# Altium PCB SolderingStation-CS.PcbDoc (part 2 of 2)
Units mm, origin at the board's own origin, x right, y up, seen from the top; angles counter-clockwise.
Board outline 138.15 x 60.81 mm, 2 copper layers (Top Layer, Bottom Layer), stack 1.671 mm thick; 179 components, 102 nets, 520 pads, 415 vias.
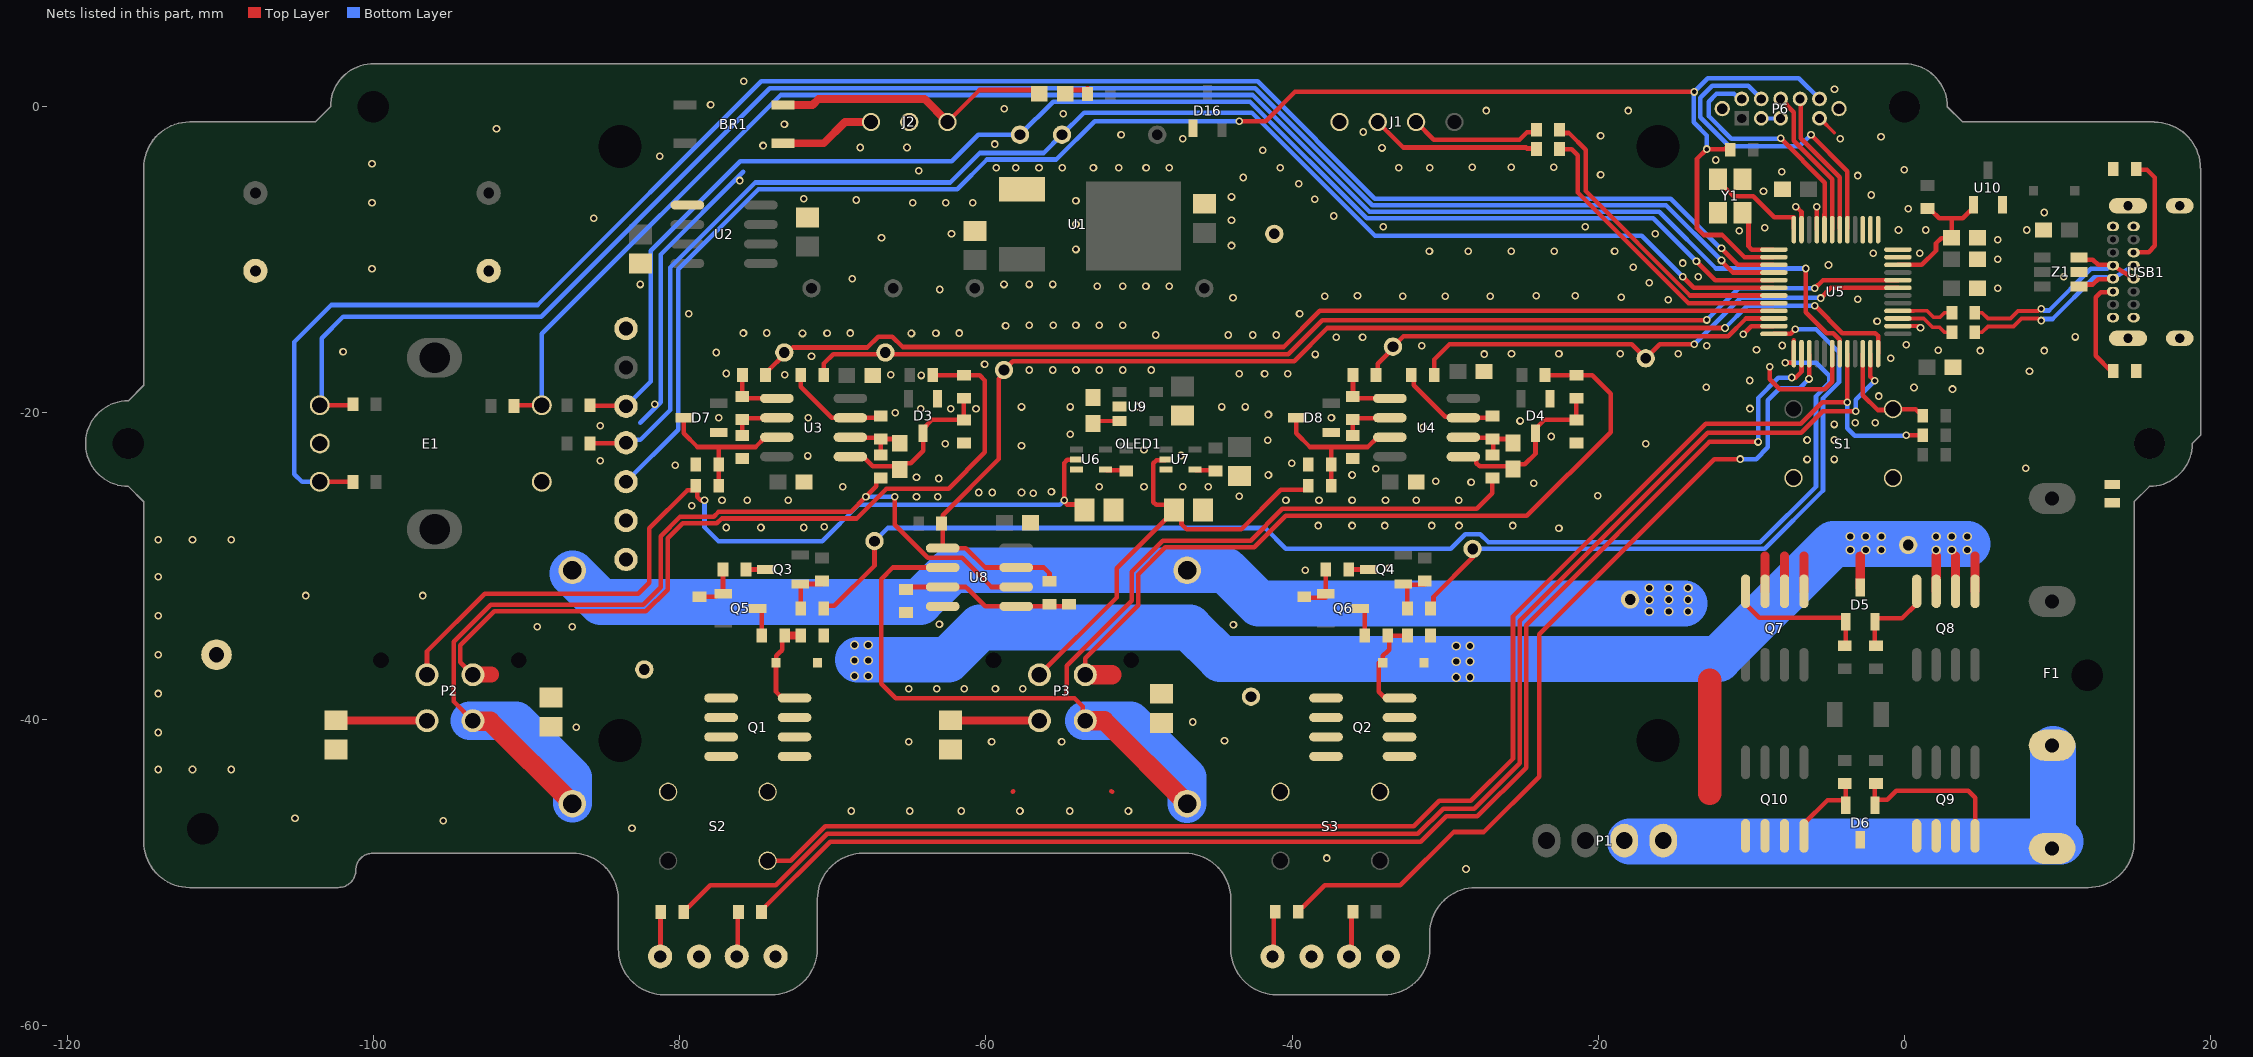
[diagram p2: the nets of this part, all layers, seen from the top]

## Via types
v1: diameter 0.5, hole 0.3, Top Layer to Bottom Layer, tented both sides, 350 vias
v2: diameter 0.6, hole 0.4, Top Layer to Bottom Layer, tented both sides, 51 vias
v3: diameter 0.5, hole 0.3, Top Layer to Bottom Layer, 14 vias

## Nets (pads, with @x,y where several pads share a name; then routed paths per layer and width w, separated by ;. In a path a pad name is that pad's centre, name@x,y a point inside that pad or via, vN(x,y) a via of type N, cw(c..) or ccw(c..) an arc to the next point about the centre after c; other vN are vias at no path point) (continued)
CH1_DRV: R8.2 TP_D1.1 U5.36 | length 43.7
  Top Layer w0.3: R8.2@-30.962,-32.766 R8.2@-30.802,-32.606 ; R8.2@-30.802,-32.86 R8.2@-30.802,-32.606 ; TP_D1.1@-28.155,-29.39 -30.762,-31.997 -30.762,-32.566 R8.2@-30.802,-32.606 ; U5.36@-8.526,-14.832 -7.433,-14.832 v1(-7.13,-14.529)
  Bottom Layer w0.3: TP_D1.1@-28.206,-28.882 -9.134,-28.882 -5.321,-25.069 -5.321,-19.052 -4.274,-18.005 -4.274,-16.035 -5.779,-14.529 v1(-7.13,-14.529)
CH1_Htr: C25.1 P3.4 Q2.5 Q2.6 Q2.7 Q2.8 R14.1 R16.2 TP_H1.1 | length 51.2
  Top Layer w0.3: P3.4@-53.5,-37.103 -53.5,-36.012 -50.05,-32.562 -50.05,-30.553 -48.273,-28.776 -42.476,-28.776 -40.423,-26.723 -24.658,-26.723 -19.189,-21.254 -19.189,-18.751 -20.402,-17.538 R16.2@-21.43,-17.538 ; R14.1@-23.474,-17.526 -23.468,-17.532 -21.944,-17.532 -21.938,-17.538
  Top Layer w1.27: P3.4@-53.5,-37.103 -51.778,-37.103
CH1_NTC: C23.1 P3.3 R30.1 U7.2 | length 30
  Top Layer w0.3: P3.3@-56.5,-37.103 -51.454,-32.057 -51.454,-30.159 -48.237,-26.942 -48.221,-26.942 C23.1@-47.764,-26.485 ; U7.2@-48.229,-23.04 -48.279,-23.09 -48.853,-23.09 -49.057,-23.294 -49.057,-25.834 -48.881,-26.01 -48.053,-26.01 C23.1@-47.721,-26.342 ; C23.1@-47.721,-26.442 C23.1@-47.721,-26.342 ; R30.1@-38.944,-25.019 -40.729,-25.019 -43.322,-27.612 -46.875,-27.612 -47.221,-27.266 -47.221,-26.842 C23.1@-47.721,-26.342
CH1_NTC_B: R63.1 TP_NTC1.1 U5.34 | length 28
  Top Layer w0.3: R63.1@-34.518,-17.526 -34.414,-17.422 -34.414,-16.802 -33.413,-15.801 TP_NTC1.1@-33.413,-15.674 -32.721,-14.982 -11.503,-14.982 -10.353,-13.832 U5.34@-8.526,-13.832
CH1_Ret: P3.1 R23.1 R26.2 U8.2 | length 81.6
  Top Layer w0.3: U8.2@-62.814,-30.099 -66.079,-30.099 -66.839,-30.859 -66.839,-37.696 -65.89,-38.645 -54.724,-38.645 -54.206,-38.645 -53.673,-39.179 -53.673,-39.993 P3.1@-53.562,-40.103 ; -54.724,-38.636 -54.724,-36.502 -50.482,-32.26 -50.482,-30.381 -48.45,-28.349 -42.709,-28.349 -40.627,-26.266 -27.924,-26.266 -26.911,-25.253 R23.1@-26.911,-24.245
  Top Layer w1.27: P3.1@-53.562,-40.103 P3.1@-53.5,-40.103 -52.266,-40.103 R26.2@-46.85,-45.519
  Bottom Layer w2.54: P3.1@-53.562,-40.103 P3.1@-53.5,-40.103 -50.545,-40.103 -46.85,-43.797 R26.2@-46.85,-45.519
CH1_SB: R65.1 U5.31 | length 20
  Top Layer w0.3: R65.1@-22.531,-1.502 -22.531,-1.522 -22.331,-1.722 -21.914,-1.722 -20.828,-2.808 -20.828,-5.509 -14.005,-12.332 U5.31@-8.576,-12.332
CH1_SEL: R47.1 U5.39 | length 56.7
  Top Layer w0.3: R47.1@-39.598,-52.578 -39.598,-52.478 -39.398,-52.278 -39.298,-52.278 -37.873,-50.853 -32.93,-50.853 -29.448,-47.371 -27.477,-47.371 -23.859,-43.752 -23.859,-34.455 -12.419,-23.015 v1(-10.731,-23.015) ; v1@-6.226,-17.782 U5.39@-6.226,-16.182
  Bottom Layer w0.3: v1(-10.731,-23.015) -9.689,-23.015 -8.927,-22.253 -8.927,-19.179 -8.14,-18.392 -6.845,-18.392 v1(-6.235,-17.782)
CH1_TC: R61.1 TP_TC1.1 U5.7 | length 34
  Top Layer w0.3: R61.1@-30.708,-17.526 -30.708,-16.514 -29.716,-15.522 -17.817,-15.522 TP_TC1.1@-16.903,-16.436 -15.989,-15.522 v1(-13.728,-15.522) ; v1(-5.473,-12.499) -4.806,-11.832 U5.7@-0.426,-11.832
  Bottom Layer w0.3: v1(-13.728,-15.522) -10.686,-12.48 -5.492,-12.48 v1(-5.473,-12.499)
CH2_ACT: R52.2 U5.38 | length 90.9
  Top Layer w0.3: R52.2@-74.65,-52.594 -74.65,-52.494 -70.162,-48.006 -31.582,-48.006 -29.931,-46.355 -27.898,-46.355 -24.713,-43.169 -24.713,-33.872 -12.738,-21.897 v1(-9.562,-21.897) ; v1(-7.353,-17.687) -7.107,-17.687 -6.726,-17.306 U5.38@-6.726,-16.182
  Bottom Layer w0.3: v1(-9.562,-21.897) -9.562,-19.027 -8.242,-17.706 -7.372,-17.706 v1(-7.353,-17.687)
CH2_BTN: R38.1 S2.2 U5.44 | length 98.4
  Top Layer w0.3: S2.2@-74.25,-49.25 -72.745,-49.25 -70.485,-46.99 -32.039,-46.99 -30.388,-45.339 -28.319,-45.339 -25.567,-42.587 -25.567,-33.289 -12.979,-20.701 -6.766,-20.701 -5.371,-19.306 v1(-3.746,-19.306) -3.726,-19.286 U5.44@-3.726,-16.132 ; v1(0.114,-21.463) R38.1@1.193,-21.463
  Bottom Layer w0.3: v1(-3.746,-19.306) -3.746,-20.991 -3.236,-21.501 0.102,-21.501 v1@0.114,-21.514
CH2_DRV: R7.2 TP_D2.1 U5.37 | length 83
  Top Layer w0.3: R7.2@-70.586,-32.766 -70.586,-32.762 -70.426,-32.603 -69.903,-32.603 -67.272,-29.972 TP_D2.1@-67.272,-28.804 ; v1(-7.784,-16.715) -7.226,-16.715 U5.37@-7.226,-16.132 U5.37@-7.226,-15.243
  Bottom Layer w0.3: TP_D2.1@-67.271,-28.374 -66.414,-27.517 -41.755,-27.517 -40.408,-28.863 -29.635,-28.863 -28.689,-27.917 -27.698,-27.917 -27.167,-28.448 -9.411,-28.448 -5.778,-24.815 -5.778,-18.9 -4.921,-18.043 -4.921,-17.564 -5.769,-16.715 v1(-7.784,-16.715)
CH2_Htr: C24.1 P2.4 Q1.5 Q1.6 Q1.7 Q1.8 R13.1 R15.2 TP_H2.1 | length 52.7
  Top Layer w0.3: P2.4@-93.5,-37.103 -94.323,-36.28 -94.323,-35.179 -92.111,-32.967 -82.205,-32.967 -80.784,-31.546 -80.784,-28.19 -79.799,-27.206 -77.567,-27.206 -77.257,-26.896 -68.435,-26.896 -66.49,-24.951 -62.426,-24.951 -60.058,-22.583 -60.058,-17.882 -60.402,-17.538 R15.2@-61.43,-17.538 ; R13.1@-63.474,-17.526 -63.468,-17.532 -61.944,-17.532 -61.938,-17.538
  Top Layer w1.016: P2.4@-93.5,-37.103 -93.481,-37.084 -92.291,-37.084
CH2_NTC: C22.1 P2.3 R29.1 U6.2 | length 58.7
  Top Layer w0.3: P2.3@-96.5,-37.103 -96.5,-35.578 -92.725,-31.803 -82.689,-31.803 -81.973,-31.087 -81.973,-27.531 -79.507,-25.065 -78.843,-25.065 -78.843,-25.489 -78.625,-25.707 v1(-78.371,-25.707) ; R29.1@-78.956,-25.019 -78.956,-24.777 R29.1@-78.944,-24.765 ; U6.2@-54.046,-23.015 -54.096,-23.065 -54.67,-23.065 -54.874,-23.269 -54.874,-25.809 -54.698,-25.985 -53.87,-25.985 C22.1@-53.538,-26.317 ; C22.1@-53.563,-26.442 C22.1@-53.563,-26.342
  Bottom Layer w0.3: v1(-78.371,-25.707) -78.371,-27.46 -77.457,-28.374 -70.675,-28.374 -68.313,-26.012 -55.177,-26.012 v1(-54.876,-25.71)
CH2_NTC_B: R62.1 TP_NTC2.1 U5.33 | length 68.2
  Top Layer w0.3: R62.1@-74.396,-17.526 -74.396,-17.426 -74.196,-17.226 -73.164,-16.194 TP_NTC2.1@-73.164,-16.055 ; TP_NTC2.1@-73.044,-16.174 -72.6,-15.73 -67.733,-15.73 -67.017,-15.014 -66.103,-15.014 -65.423,-15.693 -40.547,-15.693 -38.186,-13.332 U5.33@-8.576,-13.332
CH2_Ret: P2.1 R21.1 R25.2 U8.6 | length 72.2
  Top Layer w0.3: P2.1@-93.5,-40.103 -94.754,-38.849 -94.754,-34.953 -92.341,-32.54 -82.384,-32.54 -81.241,-31.397 -81.241,-28.044 -79.971,-26.774 -77.761,-26.774 -77.457,-26.469 -68.821,-26.469 -67.836,-25.485 v1(-67.83,-25.485) ; v1@-67.833,-25.482 -67.149,-24.797 -67.149,-24.445 -66.949,-24.245 R21.1@-66.865,-24.245 ; v1@-65.95,-25.504 v1(-65.95,-25.478) -65.95,-27.309 -63.793,-29.466 -61.531,-29.466 -59.628,-31.369 U8.6@-58.014,-31.369
  Top Layer w1.27: P2.1@-93.5,-40.103 -93.456,-40.147 -92.379,-40.147 R25.2@-87.007,-45.519
  Bottom Layer w0.3: v1(-67.83,-25.485) -67.824,-25.478 v1(-65.95,-25.478)
  Bottom Layer w1.524: R25.2@-87.007,-45.519 R25.2@-86.982,-45.494
  Bottom Layer w2.54: P2.1@-93.694,-40.103 P2.1@-93.5,-40.103 -90.677,-40.103 -86.982,-43.797 R25.2@-86.982,-45.494
CH2_SB: R66.1 U5.32 | length 19.9
  Top Layer w0.3: R66.1@-22.331,-3.043 -22.531,-2.843 R66.1@-22.531,-2.772 -21.739,-2.772 -21.336,-3.175 -21.336,-5.605 -14.109,-12.832 U5.32@-8.576,-12.832
CH2_SEL: R50.2 U5.47 | length 100
  Top Layer w0.3: R50.2@-79.73,-52.594 -79.73,-52.494 -79.53,-52.294 -79.43,-52.294 -77.989,-50.853 -73.713,-50.853 -70.358,-47.498 -31.785,-47.498 -30.134,-45.847 -28.109,-45.847 -25.14,-42.878 -25.14,-33.58 -12.845,-21.285 -6.741,-21.285 -5.346,-19.89 v1(-3.187,-19.89) ; U5.47@-2.226,-16.132 -2.226,-17.626 v1(-1.942,-17.909)
  Bottom Layer w0.3: v1(-3.187,-19.89) -3.187,-19.154 v1(-1.942,-17.909)
CH2_TC: R60.1 TP_TC2.1 U5.8 | length 73.2
  Top Layer w0.3: R60.1@-70.586,-17.526 -70.586,-16.776 -69.967,-16.157 -40.249,-16.157 -38.039,-13.947 -12.934,-13.947 v1(-12.915,-13.928) ; v1(-5.854,-11.864) -5.322,-11.332 U5.8@-0.426,-11.332
  Bottom Layer w0.3: v1(-12.915,-13.928) -12.896,-13.928 -10.832,-11.864 v1(-5.854,-11.864)
EXTAL: U5.24 Y1.3 | length 6.8
  Top Layer w0.3: Y1.3@-12.176,-4.732 -12.176,-4.832 -11.166,-5.842 -9.868,-5.842 -8.501,-7.209 -7.247,-7.209 -7.226,-7.23 U5.24@-7.226,-7.982
EXTAL33: U5.15
GND: C1.1 C2.1 C3.2 C4.1 C5.1 C6.1 C8.2 C9.2 C10.2 C11.2 C12.1 C13.1 C14.1 C15.1 C16.1 C17.1 C18.1 C19.2 C22.2 C23.2 C24.2 C25.2 C26.2 C27.1 D3.1 D4.1 D7.1 D8.1 D9.K D10.K D11.K D12.K D16.1 E1.C E1.D FB1.1 FB2.1 J1.4 J2.2 N1.1 NT1.2 OLED1.1 OLED1.2 OLED1.7 P6.0 P6.3 P6.5 P6.9 R17.1 R18.1 R31.1 R32.1 R35.1 R36.1 R39.2 R41.2 R69.1 S1.1 S1.1b S2.1 S2.1b S3.1 S3.1b TP_Gnd.1 U1.1 U2.5 U5.2 U5.11 U5.12 U5.23 U6.3 U7.3 U8.4 U9.2 U10.2 USB1.A1 USB1.A12 USB1.B1 USB1.B12 USB1.SH Y1.2 Y1.4 Z1.2 | length 25.8
  Top Layer w0.254: P6.9@-5.547,-0.765 P6.9@-5.55,-0.762 -5.526,-0.762 -4.584,-1.704 ; P6.0@-4.28,-0.329 P6.0@-4.28,-0.127 ; U5.2@-0.426,-14.332 0.932,-14.332 v1(1.045,-14.445)
  Top Layer w0.3: D7.1@-77.45,-21.27 D7.1@-77.432,-21.252 ; -58.25,-44.75 -58.204,-44.704 ; -51.796,-44.704 -51.75,-44.75 ; D8.1@-37.445,-21.27 D8.1@-37.427,-21.252 ; C14.1@-7.88,-5.726 C14.1@-7.88,-5.544 ; v1@-7.124,-6.53 -7.076,-6.53 -6.726,-6.88 U5.23@-6.726,-7.982 ; C16.1@3.174,-17.018 C16.1@3.34,-16.852
  Bottom Layer w0.254: P6.3@-9.36,-0.762 P6.5@-8.09,-0.762 ; P6.9@-5.55,-0.762 P6.9@-5.526,-0.762
  Bottom Layer w0.3: -82.583,-20.645 -81.242,-19.304 -81.242,-9.652 -75.834,-4.244
  other v1: -28.638,-49.786 -37.731,-49.075 -83.109,-47.117 -95.428,-46.634 -105.118,-46.482 -68.796,-46 -64.973,-46 -61.595,-46 -57.772,-46 -54.508,-46 -50.686,-46 -65.036,-41.48 -59.626,-41.48 -55.054,-41.48 -44.412,-41.402 -86.754,-40.538 -46.494,-40.185 -65.036,-38.026 -63.207,-38.026 -61.404,-38.026 -59.372,-38.026 -57.594,-38.026 -89.293,-33.962 -87.007,-33.962 -43.827,-33.835 -63.029,-33.81 -104.406,-31.93 -96.786,-31.93 -39.128,-30.279 -33.667,-30.152 -22.568,-27.534 -76.949,-27.485 -74.688,-27.485 -71.894,-27.485 -70.548,-27.434 -38.29,-27.358 -36.08,-27.358 -33.947,-27.358 -30.874,-27.358 -29.095,-27.358 -25.591,-27.358 -79.209,-26.063 -77.228,-25.707 -75.577,-25.707 -72.91,-25.707 -40.398,-25.707 -38.239,-25.707 -36.08,-25.707 -33.896,-25.707 -31.889,-25.707 -29.12,-25.707 -64.528,-25.48 -63.131,-25.48 -43.446,-25.453 -20.028,-25.4 -56.908,-25.25 -60.464,-25.199 -59.575,-25.199 -57.67,-25.199 -55.714,-25.148 -69.354,-24.818 -52.59,-24.818 -49.669,-24.818 -47.129,-24.818 -45.478,-24.818 -24.219,-24.587 -28.308,-24.539 -30.62,-24.46 -63.08,-24.285 -64.528,-24.208 -41.541,-24.056 -36.08,-24.056 -34.531,-23.647 7.912,-23.622 -80.276,-23.421 -40.017,-23.294 -85.179,-23.114 -6.362,-23.04 -4.584,-23.04 -71.64,-22.811 -47.256,-22.786 -49.669,-22.405 -57.67,-22.151 -62.648,-22.024 -16.903,-22.024 -41.592,-21.785 -6.362,-21.77 -4.584,-21.77 -23.075,-21.541 -54.495,-21.389 -31.433,-20.93 -85.179,-20.828 -4.584,-20.754 -3.212,-20.652 -1.917,-20.652 -25.107,-20.525 -77.432,-20.32 -71.589,-20.322 -37.427,-20.32 -41.541,-20.109 -65.925,-19.992 -64.249,-19.738 -62.293,-19.738 -60.642,-19.738 -10.089,-19.717 -57.67,-19.611 -54.495,-19.611 -44.589,-19.611 -43.065,-19.611 -50.075,-19.586 -81.623,-19.431 -1.688,-18.9 3.138,-18.443 0.623,-18.341 -12.941,-18.313 -10.097,-17.882 -64.223,-17.554 -73.139,-17.503 -66.204,-17.503 -43.446,-17.452 -41.795,-17.452 -40.271,-17.452 -76.949,-17.427 8.166,-17.272 -57.162,-17.198 -55.638,-17.198 -54.114,-17.198 -52.59,-17.198 -51.066,-17.198 -49.186,-17.198 -60.083,-16.817 -0.901,-16.436 -71.386,-16.309 -38.493,-16.182 -27.444,-16.157 -25.667,-16.129 -22.568,-16.129 -18.555,-16.129 -14.77,-16.129 -77.609,-16.055 -101.981,-16.002 4.941,-15.928 9.132,-15.928 2.197,-15.9 -9.664,-15.877 -31.533,-15.623 -12.916,-15.621 -7.988,-15.598 0.115,-15.547 -37.121,-15.064 -35.394,-15.064 11.164,-15.039 -48.907,-14.912 -44.157,-14.912 -42.556,-14.912 -41.033,-14.912 -71.97,-14.81 -64.858,-14.81 -75.831,-14.785 -74.308,-14.783 -70.369,-14.787 -68.846,-14.785 -63.257,-14.787 -61.734,-14.785 -58.711,-14.302 -57.162,-14.277 -55.587,-14.277 -54.114,-14.277 -52.59,-14.277 -51.066,-14.277 -1.79,-14.023 -79.412,-13.515 -39.509,-13.515 -15.43,-12.601 -3.06,-12.575 -43.853,-12.471 -18.504,-12.446 -37.858,-12.372 -32.778,-12.372 -29.984,-12.372 -27.063,-12.372 -35.724,-12.347 -24.04,-12.347 -21.5,-12.347 -63.004,-11.94 6.084,-11.864 -52.717,-11.737 -51.066,-11.737 -49.542,-11.737 -48.018,-11.737 -82.562,-11.61 -58.813,-11.61 -57.162,-11.61 -55.638,-11.61 -16.674,-11.508 -68.719,-11.229 -13.474,-11.102 10.402,-11.102 -100.088,-10.594 -17.716,-10.492 -4.965,-10.34 -14.49,-10.213 6.084,-9.959 -2.044,-9.578 1.004,-9.578 -31.025,-9.451 -28.485,-9.451 -25.691,-9.451 -22.872,-9.451 -18.935,-9.451 -54.114,-9.324 -43.954,-9.07 6.084,-8.689 -66.814,-8.562 -62.242,-8.308 -16.268,-8.308 -10.782,-8.105 -0.393,-8.054 1.385,-8.054 7.989,-8.054 -9.133,-7.901 -34.048,-7.851 -20.84,-7.851 -54.114,-7.673 -43.954,-7.419 -85.61,-7.292 -37.274,-7.14 9.132,-6.911 0.242,-6.657 -7.1,-6.53 -100.088,-6.268 -64.782,-6.276 -62.623,-6.276 -60.845,-6.276 -54.114,-6.149 -68.453,-6.096 -38.517,-6.046 -71.894,-6.022 -43.954,-5.895 -2.171,-5.768 -9.207,-5.514 -39.558,-5.03 -76.073,-4.826 -43.192,-4.625 -3.06,-4.498 -19.85,-4.445 -8.013,-4.244 -64.389,-4.191 -0.012,-4.117 -59.321,-3.99 -58.051,-3.99 -56.527,-3.99 -55.003,-3.99 -52.971,-3.99 -51.32,-3.99 -49.534,-3.979 -48.018,-3.99 -40.778,-3.989 -33.032,-3.99 -31,-3.99 -28.231,-3.965 -25.691,-3.965 -22.897,-3.965 -100.088,-3.736 -12.331,-3.482 -81.292,-3.228 -41.922,-2.847 -34.124,-2.695 -68.199,-2.667 -65.151,-2.667 -74.549,-2.54 -59.423,-2.441 -47.129,-2.085 -4.203,-2.085 -1.536,-1.958 -19.85,-1.905 -51.168,-1.831 -35.343,-1.653 -91.96,-1.45 -73.152,-1.143 -54.952,-0.459 -27.305,-0.254 -18.034,-0.254 -58.788,-0.129 -77.978,0.127 -4.572,1.143 -75.819,1.651
  other v3: -114.052,-43.291 -111.812,-43.291 -109.272,-43.291 -114.052,-40.871 -114.052,-38.331 -114.052,-35.791 -114.052,-33.251 -114.052,-30.711 -114.052,-28.291 -111.812,-28.291 -109.272,-28.291
NetBR1_3: BR1.3 J2.3 | length 6.3
  Top Layer w0.508: BR1.3@-73.254,-2.393 -70.592,-2.393 -69.199,-1 J2.3@-67.5,-1
NetBR1_4: BR1.4 C21.1 J2.1 | length 18.4
  Top Layer w0.3: J2.1@-62.5,-1 -60.41,1.09 C21.1@-56.513,1.09
  Top Layer w0.508: BR1.4@-73.254,0.107 -71.321,0.107 -70.92,0.508 -64.008,0.508 J2.1@-62.5,-1
NetC7_1: C7.1 D3.3 R15.1 R17.2 U3.5 | length 11.2
  Top Layer w0.3: U3.5@-68.809,-22.86 -68.009,-22.86 -67.374,-23.495 -65.519,-23.495 -65.31,-23.287 -64.902,-23.287 -64.097,-22.482 -64.097,-21.043 -63.513,-20.459 R17.2@-61.43,-20.459 R15.1@-61.43,-19.038
NetC7_2: C7.2 R21.2 R22.1 U3.6 | length 4.8
  Top Layer w0.3: U3.6@-68.809,-21.59 -68.767,-21.632 -66.865,-21.632 R22.1@-66.683,-21.632 ; R21.2@-66.865,-22.745 R22.1@-66.865,-21.705 -66.683,-21.705 -65.673,-21.705 C7.2@-65.392,-21.987
NetC20_1: C20.1 D4.3 R16.1 R18.2 U4.5 | length 11.4
  Top Layer w0.3: U4.5@-28.809,-22.86 -28.106,-22.86 -27.967,-22.999 -27.967,-23.279 -27.751,-23.495 -25.564,-23.495 -25.427,-23.358 -24.79,-23.358 -24.097,-22.665 D4.3@-24.097,-21.318 -24.097,-21.043 -23.513,-20.459 R18.2@-21.43,-20.459 R16.1@-21.43,-19.038
NetC20_2: C20.2 R23.2 R24.1 U4.6 | length 4.4
  Top Layer w0.3: U4.6@-28.809,-21.59 -28.767,-21.632 R24.1@-26.967,-21.632 ; R23.2@-26.911,-22.745 -26.86,-22.693 -26.86,-21.762 R24.1@-26.916,-21.705 -25.821,-21.705 C20.2@-25.564,-21.961
NetC21_2: C21.2 R58.1 | length 1.4
  Top Layer w0.3: C21.2@-54.813,1.09 R58.1@-53.365,1.09
NetC26_1: C26.1 U9.3 | length 1.8
  Top Layer w0.254: C26.1@-52.996,-20.69 -52.842,-20.536 U9.3@-51.275,-20.536
  Top Layer w0.4: U9.3@-51.289,-20.549 U9.3@-51.275,-20.536
NetD1_A: D1.A Q1.4 R1.1 R5.2 | length 5.6
  Top Layer w0.3: D1.A@-73.622,-36.322 D1.A@-73.654,-36.322 ; Q1.4@-73.292,-38.624 -73.702,-38.214 D1.A@-73.702,-36.322 D1.A@-73.654,-36.322 ; R5.2@-73.126,-34.544 -73.286,-34.703 -73.286,-35.478 -73.368,-35.56 -73.385,-35.56 -73.689,-35.863 -73.689,-36.287 D1.A@-73.654,-36.322
  Top Layer w0.508: R5.2@-73.126,-34.544 R1.1@-72.086,-34.544
NetD2_A: D2.A Q2.4 R2.1 R6.2 | length 5.7
  Top Layer w0.3: D2.A@-34.332,-36.322 -34.332,-38.214 Q2.4@-33.922,-38.624 ; D2.A@-34.078,-36.322 D2.A@-34.03,-36.322 ; D2.A@-33.998,-36.322 D2.A@-34.03,-36.322 ; R2.1@-32.462,-34.544 -33.596,-34.544 -33.662,-34.609 -33.662,-35.478 -33.744,-35.56 -33.761,-35.56 -34.065,-35.863 -34.065,-36.287 D2.A@-34.03,-36.322
NetD5_1: D5.1 Q7.4 R19.2 | length 9.4
  Top Layer w0.3: Q7.4@-10.376,-31.652 -10.376,-32.504 -9.493,-33.387 -4.006,-33.387 -3.833,-33.56 D5.1@-3.833,-33.653 -3.833,-35.014 R19.2@-3.899,-35.08
NetD5_2: D5.2 Q8.4 R20.2 | length 5.5
  Top Layer w0.3: R20.2@-1.867,-35.08 -1.933,-35.014 D5.2@-1.933,-33.653 -1.933,-33.59 -1.76,-33.417 -0.165,-33.417 0.8,-32.452 Q8.4@0.8,-31.652
NetD6_1: D6.1 Q9.4 R28.1 | length 10.9
  Top Layer w0.3: D6.1@-1.933,-45.627 D6.1@-1.933,-45.352 ; R28.1@-1.933,-44.266 D6.1@-1.933,-45.352 ; Q9.4@4.61,-47.628 4.61,-45.125 4.163,-44.679 -0.543,-44.679 -1.127,-45.263 -1.844,-45.263 D6.1@-1.933,-45.352
NetD6_2: D6.2 Q10.4 R27.1 | length 5.1
  Top Layer w0.3: Q10.4@-6.566,-46.828 -5.026,-45.288 -4.006,-45.288 -3.833,-45.461 D6.2@-3.833,-45.627 -3.833,-44.266 R27.1@-3.899,-44.2
NetD7_3: D7.3 R29.2 R31.2 U3.3 | length 10.6
  Top Layer w0.3: D7.3@-79.7,-20.32 -79.718,-20.338 -79.718,-21.336 -78.829,-22.225 -77.444,-22.225 -75.044,-22.225 -74.409,-21.59 U3.3@-73.609,-21.59 ; R29.2@-77.444,-25.019 R31.2@-77.444,-23.368 -77.444,-22.226
NetD8_3: D8.3 R30.2 R32.2 U4.3 | length 12.5
  Top Layer w0.3: D8.3@-39.955,-20.358 -39.733,-20.358 D8.3@-39.695,-20.32 D8.3@-39.672,-20.297 ; D8.3@-39.7,-20.32 -39.718,-20.338 -39.718,-21.336 -38.829,-22.225 -37.444,-22.225 -35.044,-22.225 -34.409,-21.59 U4.3@-33.609,-21.59 ; -37.444,-22.226 R32.2@-37.444,-23.368 ; R32.2@-37.444,-23.368 -37.444,-25.019 R32.2@-37.444,-23.368
NetD9_A: D9.A R47.2 | length 3
  Top Layer w0.3: D9.A@-41.27,-55.5 -41.184,-55.414 -41.184,-52.68 R47.2@-41.098,-52.594
NetD10_A: D10.A R49.1 | length 3
  Top Layer w0.3: D10.A@-36.27,-55.5 -36.118,-55.348 -36.118,-52.694 R49.1@-36.018,-52.594
NetD11_A: D11.A R50.1 | length 2.9
  Top Layer w0.3: D11.A@-81.27,-55.5 -81.25,-55.48 -81.25,-52.614 R50.1@-81.23,-52.594
NetD12_A: D12.A R52.1 | length 3
  Top Layer w0.3: D12.A@-76.27,-55.5 -76.21,-55.44 -76.21,-52.654 R52.1@-76.15,-52.594
NetF1_1: F1.1 F1.1a P1.3 P1.4 | length 34
  Bottom Layer w3: P1.3@-17.919,-48 -15.76,-48 9.64,-48 F1.1@10.198,-48 ; F1.1@9.69,-47.828 F1.1a@9.69,-41.963
NetFB1_2: FB1.2 P2.2 | length 6
  Top Layer w0.508: FB1.2@-102.451,-40.071 -102.435,-40.087 -96.516,-40.087 P2.2@-96.5,-40.103
NetFB2_2: FB2.2 P3.2 | length 5.8
  Top Layer w0.508: FB2.2@-62.319,-40.071 -62.303,-40.087 -56.516,-40.087 P3.2@-56.5,-40.103
NetJ1_2: J1.2 R65.2 | length 8.6
  Top Layer w0.3: J1.2@-31.897,-1 -30.738,-2.159 -25.146,-2.159 -24.655,-1.668 -24.197,-1.668 R65.2@-24.031,-1.502
NetJ1_3: J1.3 R66.2 | length 11.1
  Top Layer w0.3: J1.3@-34.397,-1 -32.73,-2.667 -24.719,-2.667 -24.655,-2.731 -24.231,-2.731 -24.09,-2.872 R66.2@-24.031,-2.872
NetQ3_1: Q3.1 R3.2 R7.1 | length 3.3
  Top Layer w0.3: R7.1@-72.086,-32.766 -72.086,-31.206 Q3.1@-72.116,-31.176 -70.701,-31.176 -70.801,-31.076 R3.2@-70.701,-30.976
NetQ3_3: Q3.3 R9.2 | length 1.3
  Top Layer w0.3: R9.2@-75.666,-30.226 Q3.3@-74.366,-30.226
NetQ4_1: Q4.1 R4.2 R8.1 | length 2.9
  Top Layer w0.3: R8.1@-32.486,-33.02 -32.486,-31.23 R4.2@-31.331,-31.23
NetQ4_3: Q4.3 R10.2 | length 1.5
  Top Layer w0.3: R10.2@-36.296,-30.226 Q4.3@-34.822,-30.226
NetQ5_1: Q5.1 R9.1 R11.1 | length 3.2
  Top Layer w0.3: R11.1@-78.702,-32.016 -77.635,-32.016 -77.435,-31.816 Q5.1@-77.16,-31.816 -77.166,-31.81 R9.1@-77.166,-30.226
NetQ5_3: Q5.3 R5.1 | length 2
  Top Layer w0.3: Q5.3@-74.91,-32.766 -74.735,-32.766 -74.626,-32.876 R5.1@-74.626,-34.544
NetQ6_1: Q6.1 R10.1 R12.1 | length 2.8
  Top Layer w0.3: R12.1@-39.032,-32.07 -37.79,-32.07 -37.796,-32.064 R10.1@-37.796,-30.48
NetQ6_3: Q6.3 R6.1 | length 1.8
  Top Layer w0.3: R6.1@-35.256,-34.544 Q6.3@-35.256,-32.768
NetR22_2: R22.2 R60.2 U3.7 | length 6.7
  Top Layer w0.3: R60.2@-72.086,-17.526 -72.086,-18.3 -70.068,-20.318 -68.811,-20.318 -68.809,-20.32 R22.2@-67.003,-20.32
NetR24_2: R24.2 R61.2 U4.7 | length 6.8
  Top Layer w0.3: R61.2@-32.208,-17.526 -32.05,-17.684 -32.05,-18.204 -29.991,-20.263 -28.866,-20.263 U4.7@-28.809,-20.32 -27.031,-20.32 R24.2@-26.916,-20.205
NetR33_1: R33.1 R35.2 U3.2 | length 3.2
  Top Layer w0.3: R35.2@-75.908,-21.348 -75.908,-21.336 R33.1@-75.908,-20.447 ; R33.1@-75.908,-20.435 -75.835,-20.362 -73.651,-20.362 U3.2@-73.609,-20.32
NetR33_2: R33.2 R62.2 U3.1 | length 4.4
  Top Layer w0.3: R33.2@-75.908,-19.05 -73.609,-19.05 -73.005,-19.05 U3.1@-72.959,-19.004 ; R33.2@-75.908,-18.935 -75.896,-18.923 R62.2@-75.896,-17.526
NetR34_1: R34.1 R36.2 U4.2 | length 3.5
  Top Layer w0.3: R36.2@-36.03,-21.475 R34.1@-36.03,-20.435 -35.957,-20.362 -33.651,-20.362 U4.2@-33.609,-20.32
NetR34_2: R34.2 R63.2 U4.1 | length 4.5
  Top Layer w0.3: R34.2@-36.03,-19.05 U4.1@-33.609,-19.05 -33.101,-19.05 U4.1@-32.999,-18.949 ; R34.2@-36.03,-18.935 -36.018,-18.923 R63.2@-36.018,-17.526
NetR39_1: R39.1 USB1.A5 | length 6.6
  Top Layer w0.3: R39.1@13.539,-17.272 13.489,-17.272 12.484,-16.267 12.484,-12.446 12.809,-12.121 13.574,-12.121 USB1.A5@13.62,-12.075
NetR41_1: R41.1 USB1.B5 | length 7.5
  Top Layer w0.3: USB1.B5@14.97,-9.525 14.998,-9.497 15.941,-9.497 16.346,-9.092 16.346,-4.624 15.837,-4.115 15.19,-4.115 R41.1@15.139,-4.064
NetR54_1: R54.1 U6.4 | length 1.4
  Top Layer w0.3: U6.4@-52.171,-23.69 -52.121,-23.74 -50.885,-23.74 R54.1@-50.835,-23.79
NetR55_1: R55.1 U7.4 | length 1.4
  Top Layer w0.3: U7.4@-46.329,-23.69 -46.279,-23.74 -45.043,-23.74 R55.1@-44.993,-23.79
NetR68_1: R68.1 R69.2 R70.1 U8.3 U8.5 | length 11.1
  Top Layer w0.3: R69.2@-65.113,-31.369 U8.3@-62.814,-31.369 -61.303,-31.369 -61.177,-31.495 -60.033,-32.639 U8.5@-58.014,-32.639 -55.842,-32.639 R68.1@-54.572,-32.639
OVER_CURRENT: R67.1 R70.2 TP_OC.1 U5.48 U8.1 U8.7 | length 82.3
  Top Layer w0.3: R70.2@-55.842,-31 -55.842,-30.48 -56.223,-30.099 U8.7@-58.014,-30.099 -60.033,-30.099 -61.303,-28.829 U8.1@-62.814,-28.829 -62.814,-27.231 -62.814,-26.679 -59.143,-23.008 -59.143,-17.769 -58.815,-17.44 TP_OC.1@-58.815,-17.197 -58.232,-16.614 -39.868,-16.614 -37.709,-14.455 v1(-11.721,-14.455) ; v1(-5.854,-13.007) -5.834,-13.007 -4.056,-14.785 -1.902,-14.785 -1.726,-14.961 U5.48@-1.726,-16.132
  Bottom Layer w0.3: v1(-11.721,-14.455) -10.274,-13.007 v1(-5.854,-13.007)
PGND: D6.3 NT1.1 Q9.1 Q9.2 Q9.3 Q10.1 Q10.2 Q10.3 R25.1 R26.1 TP_PGND.1 | length 82.5
  Top Layer w1.524: -12.712,-44.859 -12.712,-37.467
  Bottom Layer w3: R25.1@-86.982,-30.501 -85.141,-32.342 -64.305,-32.342 -62.242,-30.279 R26.1@-46.85,-30.279 -44.335,-30.279 -42.176,-32.438 -14.363,-32.438
  other v2: -16.667,-32.969 -15.397,-32.969 -14.127,-32.969 -16.667,-32.207 -15.397,-32.207 -14.127,-32.207 -16.667,-31.445 -15.397,-31.445 -14.127,-31.445
PTA4: U5.21 | length 1.6
  Top Layer w0.3: v3(-5.727,-6.53) v3@-5.727,-6.491 ; U5.21@-5.726,-8.032 v3@-5.726,-6.492
PTC2: U5.35 | length 2.2
  Top Layer w0.3: v3(-10.528,-14.861) -9.998,-14.332 U5.35@-8.526,-14.332
PTD1: U5.42 | length 7.2
  Top Layer w0.3: v3(-8.8,-16.995) -8.8,-17.808 -8.14,-18.468 -5.219,-18.468 -4.726,-17.975 U5.42@-4.726,-16.132
QUAD_A: E1.B R44.1 U5.28 | length 113.3
  Top Layer w0.3: E1.B@-103.5,-19.5 -101.53,-19.5 R44.1@-101.334,-19.304 ; v1@-12.019,-10.041 -11.229,-10.832 U5.28@-8.576,-10.832
  Bottom Layer w0.3: E1.B@-103.5,-19.5 -103.378,-19.378 -103.378,-15.113 -101.981,-13.716 -89.027,-13.716 -74.104,1.207 -42.409,1.207 -34.766,-6.436 -15.575,-6.436 -11.969,-10.041 v1(-11.95,-10.041)
QUAD_B: E1.A R46.1 U5.27 | length 121.3
  Top Layer w0.3: E1.A@-103.5,-24.5 -101.45,-24.5 R46.1@-101.334,-24.384 ; v1@-11.975,-9.248 -10.891,-10.332 U5.27@-8.576,-10.332
  Bottom Layer w0.3: E1.A@-103.5,-24.5 -104.659,-24.5 -105.156,-24.003 -105.156,-15.367 -102.743,-12.954 -89.281,-12.954 -74.676,1.651 -42.249,1.651 -34.589,-6.009 -15.265,-6.009 -12.126,-9.148 -12.104,-9.148 -12.004,-9.248 v1(-11.95,-9.248)
QUAD_BTN: E1.E R45.1 U5.43 | length 107
  Top Layer w0.3: R45.1@-90.817,-19.558 -90.759,-19.5 E1.E@-89,-19.5 ; v1(-6.438,-10.569) -6.438,-13.439 -5.079,-14.798 -4.647,-14.798 -4.226,-15.219 U5.43@-4.226,-16.182
  Bottom Layer w0.3: E1.E@-89,-19.5 -89,-14.832 -73.406,0.762 -42.568,0.762 -34.943,-6.863 -16.014,-6.863 -12.308,-10.569 v1(-6.438,-10.569)
RESETb: OLED1.3 P6.10 R59.1 U5.26 | length 112.6
  Top Layer w0.3: v1(-43.446,-0.942) -41.709,-0.942 -39.804,0.963 v1(-13.728,0.963) ; R59.1@-11.38,-2.819 -11.583,-2.616 -11.736,-2.769 v1(-12.916,-2.769) -13.551,-3.404 -13.551,-7.95 -13.119,-8.382 -11.9,-8.382 -10.45,-9.832 U5.26@-8.526,-9.832
  Bottom Layer w0.3: OLED1.3@-83.5,-24.492 -80.099,-21.091 -80.099,-10.63 -74.849,-5.38 -61.854,-5.38 -59.926,-3.452 -55.405,-3.452 -52.895,-0.942 v1(-43.446,-0.942) ; v1(-12.916,-2.769) -12.916,-1.881 -13.774,-1.023 -13.774,0.917 v1(-13.728,0.963) -12.839,1.852 -6.894,1.852 P6.10@-5.55,0.508
SCL: OLED1.5 R53.1 TP_SCL.1 U5.29 | length 95.3
  Top Layer w0.3: R53.1@-85.85,-19.5 -85.814,-19.536 OLED1.5@-83.536,-19.536 ; v1(-13.588,-10.104) -12.361,-11.332 U5.29@-8.576,-11.332
  Bottom Layer w0.3: OLED1.5@-83.5,-19.572 -81.877,-17.949 -81.877,-9.398 -76.035,-3.556 -63.205,-3.556 -62.214,-3.556 -60.489,-1.831 TP_SCL.1@-57.772,-1.831 -55.606,0.335 -42.744,0.335 -35.117,-7.292 -16.401,-7.292 v1(-13.588,-10.104)
SDA: OLED1.4 R51.1 TP_SDA.1 U5.30 | length 96.4
  Top Layer w0.3: R51.1@-85.85,-22 -85.826,-21.976 OLED1.4@-83.524,-21.976 ; v1(-14.49,-11.102) -13.76,-11.832 U5.30@-8.576,-11.832
  Bottom Layer w0.3: OLED1.4@-83.5,-21.952 -83.315,-21.767 -82.562,-21.767 -80.607,-19.812 -80.607,-10.503 -75.057,-4.953 -62.316,-4.953 -60.388,-3.025 -56.222,-3.025 TP_SDA.1@-55.028,-1.831 -53.581,-0.383 -42.633,-0.383 -34.581,-8.435 -17.157,-8.435 v1(-14.49,-11.102)
SEL_BTN: R37.1 S1.2b U5.46 | length 7.3
  Top Layer w0.3: U5.46@-2.726,-16.132 -2.726,-18.835 -1.749,-19.812 -0.812,-19.812 S1.2b@-0.75,-19.75 0.723,-19.75 1.193,-20.22 R37.1@1.193,-20.32
SWD_CLK: P6.4 U5.17 | length 21.4
  Top Layer w0.3: v1(-6.108,-1.831) -3.726,-4.213 U5.17@-3.726,-7.982
  Bottom Layer w0.3: P6.4@-9.36,0.508 -10.213,1.361 -12.568,1.361 -13.347,0.582 -13.347,-0.688 -11.442,-2.593 -6.87,-2.593 v1(-6.108,-1.831)
SWD_DIO: P6.2 U5.20 | length 15.9
  Top Layer w0.3: v1(-8.09,-2.066) -5.2,-4.956 -5.2,-7.012 -5.226,-7.038 U5.20@-5.226,-8.032
  Bottom Layer w0.3: P6.2@-10.63,0.508 -10.808,0.508 -11.136,0.836 -12.28,0.836 -12.788,0.328 -12.788,-0.612 -11.313,-2.087 -8.111,-2.087 v1(-8.09,-2.066)
SWD_Rx: P6.8 U5.18 | length 9.6
  Top Layer w0.3: P6.8@-6.82,0.508 -6.769,0.457 -6.769,-2.059 -4.226,-4.602 U5.18@-4.226,-7.982
SWD_Tx: P6.6 U5.19 | length 9.9
  Top Layer w0.3: P6.6@-8.09,0.508 -7.226,-0.356 -7.226,-2.237 -4.726,-4.737 U5.19@-4.726,-8.032
USBD_N: R42.2 U5.4 | length 3.8
  Top Layer w0.254: U5.4@-0.426,-13.332 0.601,-13.332 0.605,-13.328 1.468,-13.328 1.893,-13.753 2.33,-13.753 2.621,-13.462 R42.2@3.098,-13.462
USBD_P: R43.2 U5.3 | length 3.9
  Top Layer w0.254: U5.3@-0.426,-13.832 0.601,-13.832 0.605,-13.836 1.258,-13.836 1.826,-14.404 2.293,-14.404 2.621,-14.732 R43.2@3.098,-14.732
USBD_R_N: R42.1 USB1.A7 USB1.B7 Z1.3 | length 14.9
  Top Layer w0.254: R42.1@4.598,-13.462 5.075,-13.462 5.456,-13.843 6.913,-13.843 7.421,-13.335 8.734,-13.335 8.861,-13.208 v1(8.928,-13.208)
  Top Layer w0.3: Z1.3@11.271,-9.85 11.406,-9.985 12.309,-9.985 12.653,-10.329 13.574,-10.329 USB1.A7@13.62,-10.375 USB1.B7@14.97,-11.225
  Bottom Layer w0.3: v1(8.928,-13.208) 8.982,-13.208 9.086,-13.312 9.441,-13.312 12.175,-10.577 13.241,-10.577 13.443,-10.375 USB1.A7@13.62,-10.375
USBD_R_P: R43.1 USB1.A6 USB1.B6 Z1.1 | length 14.8
  Top Layer w0.254: R43.1@4.598,-14.732 5.075,-14.732 5.456,-14.351 7.123,-14.351 7.631,-13.843 8.734,-13.843 8.861,-13.97 v1(8.928,-13.97)
  Top Layer w0.3: Z1.1@11.271,-11.75 11.406,-11.616 12.298,-11.616 12.649,-11.265 13.58,-11.265 USB1.A6@13.62,-11.225
  Bottom Layer w0.3: v1(8.928,-13.97) 8.982,-13.97 9.086,-13.866 9.67,-13.866 12.405,-11.131 13.21,-11.131 13.243,-11.164 13.559,-11.164 USB1.A6@13.62,-11.225 USB1.B6@14.97,-10.375
Vpp: D1.K D2.K D5.3 Q1.1 Q1.2 Q1.3 Q2.1 Q2.2 Q2.3 Q7.1 Q7.2 Q7.3 Q8.1 Q8.2 Q8.3 R1.2 R2.2 TP_Vpp.1 | length 93.1
  Top Layer w0.6: Q7.3@-9.106,-31.652 -9.106,-29.353 ; Q7.2@-7.836,-31.652 -7.836,-29.353 ; Q7.1@-6.566,-31.652 -6.566,-29.353 ; D5.3@-2.883,-31.403 -2.883,-29.353 ; Q8.3@2.07,-31.652 2.07,-29.353 ; Q8.2@3.34,-31.652 3.34,-29.353 ; Q8.1@4.61,-31.652 4.61,-29.353
  Bottom Layer w3: v2@-68.338,-36.123 -62.482,-36.123 -60.385,-34.026 -46.708,-34.026 -44.666,-36.068 -30.467,-36.068 -28.385,-36.068 -12.154,-36.068 -4.634,-28.548 -2.527,-28.548 0.242,-28.548 3.086,-28.548 4.102,-28.548
  other v2: -29.274,-37.262 -28.385,-37.262 -68.567,-37.186 -67.678,-37.186 -29.274,-36.246 -28.385,-36.246 -68.567,-36.17 -67.678,-36.17 -29.274,-35.23 -28.385,-35.23 -68.567,-35.154 -67.678,-35.154 -3.543,-28.956 -2.527,-28.956 -1.511,-28.956 2.07,-28.956 3.086,-28.956 4.102,-28.956 -3.543,-28.067 -2.527,-28.067 -1.511,-28.067 2.07,-28.067 3.086,-28.067 4.102,-28.067
VrefH: C18.2 R48.2 U5.10 U10.1 | length 9
  Top Layer w0.3: U5.10@-0.426,-10.332 1.139,-10.332 2.058,-9.413 2.058,-8.932 2.398,-8.592 3.045,-8.592 C18.2@3.075,-8.562 3.075,-7.292 ; R48.2@1.766,-6.799 2.259,-7.292 3.075,-7.292 ; U10.1@4.491,-6.599 3.798,-7.292 3.075,-7.292
Vrefout: U5.13
XTAL: U5.25 Y1.1 | length 4
  Top Layer w0.3: Y1.1@-10.576,-6.932 -10.188,-7.32 -10.188,-9.114 -9.97,-9.332 U5.25@-8.576,-9.332
XTAL32: U5.14
pads on no net: E1.0 OLED1.0 P2.0 P3.0 S1.2 S2.2b S3.2b SP1.3 SP2.0 SP3.0 SP4.0 SP5.0 SP6.0 U2.4 U2.8 U6.1 U7.1 U10.3 USB1.A8 USB1.B8 Z1.4 Z1.6

## Polygon pours and split planes (outlines as drawn)
GND on Top Layer "Top Layer-GND" (solid, remove dead copper, pour order 16): -120.433,4.57 20.384,4.57 20.384,-58.266 -120.433,-58.266
PGND on Top Layer "Top Layer-PGND 1" (solid, remove dead copper, pour order 15): -13.55,-43.484 -13.957,-43.891 -14.313,-43.917 -21.323,-43.917 -26.988,-49.581 -26.988,-51.054 -13.192,-51.054 -13.17,-51.076 15.119,-51.076 15.119,-25.298 -12.551,-25.298 -22.289,-35.128 -22.289,-37.414 -21.095,-38.608 -13.932,-38.608 -13.55,-38.99
-9V on Top Layer "Top Layer -9V" (solid, pour order 8): -81,-7 -73,-7 -73,-13 -81,-13
Vpp on Top Layer "Top Layer-Vpp3" (solid, pour order 6): -75.349,-31.496 -75.349,-43.434 -67.145,-43.434 -67.145,-31.496
Vpp on Top Layer "Top Layer-Vpp2" (solid, pour order 4): -27.645,-42.748 -28.382,-43.485 -28.385,-43.485 -35.888,-43.485 -35.888,-31.75 -27.645,-31.75
AC24a on Top Layer "Top Layer-AC24a" (solid, pour order 2): -11.715,-36.299 -2.806,-36.299 -2.806,-42.979 -11.715,-42.979
AC24b on Top Layer "Top Layer-AC24b" (solid, pour order 1): -2.806,-36.299 6.236,-36.299 6.236,-42.979 -2.806,-42.979
CH2_Htr on Top Layer "Top Layer-CH2_Htr" (solid, pour order 10): -93.561,-38.354 -92.799,-39.116 -82.258,-39.116 -81.115,-40.259 -81.115,-43.434 -75.527,-43.434 -75.527,-34.544 -92.418,-34.544 -93.561,-35.687
CH1_Htr on Top Layer "Top Layer-CH1_Htr" (solid, pour order 7): -53.561,-38.354 -52.799,-39.116 -42.258,-39.116 -41.115,-40.259 -41.115,-43.434 -35.527,-43.434 -35.527,-34.544 -51.27,-34.544 -53.561,-36.835
Vpp on Top Layer "Top Layer-Vpp1" (solid, pour order 3): 5.842,-31.854 -11.011,-31.854 -11.011,-25.298 5.842,-25.298
GND on Bottom Layer "Bottom Layet = Gnd" (solid, remove dead copper, pour order 18): -120.637,4.341 20.638,4.341 20.638,-58.422 -120.637,-58.422
+3V3 on Bottom Layer "Bottom_+5V" (solid, pour order 9): -67.982,-19.128 -67.601,-19.509 -66.433,-19.509 -66.052,-19.128 -28.155,-19.128 -27.876,-19.408 -26.631,-19.408 -26.378,-19.155 -26.378,-18.288 -26.632,-18.034 -44.158,-18.034 -44.158,-15.748 -44.666,-15.24 -44.92,-15.24 -46.952,-15.24 -47.46,-15.748 -47.46,-18.034 -77.454,-18.034 -77.761,-18.341 -77.761,-18.824 -77.457,-19.128

## Keep-outs
Keep-Out Layer:
  lines w0.2: -116,-24.8 cw(c-116,-22) -116,-19.2 ; -115,-25.8 -115,-48 ccw(c-112,-48) -112,-51 -102.286,-51 ccw(c-102.286,-49.862) -101.148,-49.862 cw(c-100.048,-49.862) -100.048,-48.762 ; -115,-18.2 -115,-4 cw(c-112,-4) -112,-1 ; -111.963,-1 -103.8,-1 -102.8,0 cw(c-100,0) -99.926,2.799 0,2.814 ; -100.048,-48.765 -87,-48.765 cw(c-87,-51.765) -84,-51.765 -84,-55 ; 0,2.8 cw(c0,0) 2.8,0 3.8,-1 16.329,-1 ; 15,-25.8 15,-48 cw(c12,-48) 12,-51 -28,-51 ccw(c-28,-54) -31,-54 -31,-55 cw(c-34,-55) -34,-58 -41,-58 cw(c-41,-55) -44,-55 ; 16,-24.8 ccw(c16,-22) 18.8,-22 19.355,-21.445 ; 16.329,-1.013 cw(c16.329,-4.013) 19.329,-4.013 ; 19.34,-21.445 19.34,-4.013 ; -84,-55 ccw(c-81,-55) -81,-58 -74,-58 ccw(c-74,-55) -71,-55 -71,-51.765 cw(c-68,-51.765) -68,-48.765 -47,-48.765 cw(c-47,-51.765) -44,-51.765 -44,-55 ; -84,-55 -84,-55 ; -44,-55 -44,-55
  lines w0.254: -116,-24.8 -115,-25.8 ; -116,-19.2 -115,-18.2 ; 15,-25.8 16,-24.8

## Other copper
Bottom Layer:
  rectangle net Vpp: -81.242,-43.434 -67.068,-34.622
  rectangle net Vpp: -41.11,-43.434 -27.013,-34.798

## Silkscreen, mask and mechanical layers (free items; w line width, h text height)
Top Overlay:
  circle w0.254: c-10.528,-14.861 r0.406
  circle w0.254: c-8.8,-16.995 r0.406
  circle w0.254: c-5.727,-6.53 r0.406
  lines w0.2: -77.432,-17.526 -76.67,-18.288 ; -37.554,-17.526 -36.792,-18.288 ; -23.126,-44.693 -23.126,-43.296 -21.094,-43.296 -21.094,-44.693 ; -17.981,-44.704 -17.981,-43.307 -15.949,-43.307 -15.949,-44.704
  text "18VAC C.T." at -69.901,-5.639 h1.02
  text "SET-BACK" at -37.262,-5.766 h1.02
  text "Version" at -38.493,-10.975 h1.52
  text ".Version" at -27.444,-10.975 h1.52
  text "CH #1" at -48.196,-36.426 h1.02
  text "CH #2" at -88.455,-36.68 h1.02
  text "8A" at 10.427,-37.922 h1.52 r90
  text "24VAC" at -18.833,-43.589 h1.02 r90
Bottom Overlay:
  circle w0.254: c-8.8,-16.995 r0.406
  circle w0.254: c-10.528,-14.861 r0.406
  circle w0.254: c-5.727,-6.53 r0.406
  text "CH #2" at -75.159,-51.613 h1.02
  text "CH #1" at -35.179,-51.994 h1.02
Mechanical 1:
  lines w0.2: -127.876,-55.499 -33.642,-55.499 ; -123.675,-47 -55,-47 ; -122.034,-21.996 20.485,-21.996

## Dimensions
2.54,0 to 12,-51 on Mechanical 1
-116,-19.46 to 16,-19.46 on Mechanical 1
-100,0 to 0,0 on Mechanical 1
-100,0 to -118.54,-22 on Mechanical 1
-102.54,0 to -123.675,-47 on Mechanical 1
-102.54,0 to -127.876,-55.499 on Mechanical 1

## Text inside footprints (layer, text, board x,y; h text height)
BR1: Top Overlay "~" at -73.754,-2.943 h1.5 r90; Top Overlay "~" at -73.654,-0.643 h1.5 r90; Top Overlay "+" at -76.854,-0.543 h1.5 r90; Top Overlay "-" at -76.954,-2.843 h1.5 r90
JLC_Serial_Number1: Top Overlay "JLCJLCJLCJLC" at -7.328,-50.292 h0.8
Logo1: Top Overlay "OSHW" at -109.918,-21.338 h0.76; Top Overlay "o" at -106.463,-23.954 h10.16
OLED1: Bottom Overlay "SDA" at -82,-21.5 h1.02 r180; Bottom Overlay "SCL" at -82,-19 h1.02 r180; Bottom Overlay "Vcc" at -82,-16.5 h1.02 r180; Bottom Overlay "Gnd" at -82,-14 h1.02 r180; Bottom Overlay "CS" at -82,-29.12 h1.02 r180; Bottom Overlay "DC" at -82,-26.548 h1.02 r180; Bottom Overlay "RES" at -82,-24.048 h1.02 r180